# Altium PCB VasSnow_2021-12-09.pcbdoc
Units mil, origin at the board's own origin, x right, y up, seen from the top; angles counter-clockwise.
Board outline 1824 x 2137.36 mil, 2 copper layers (Top Layer, Bottom Layer); 14 components, 22 nets, 74 pads, 49 vias.
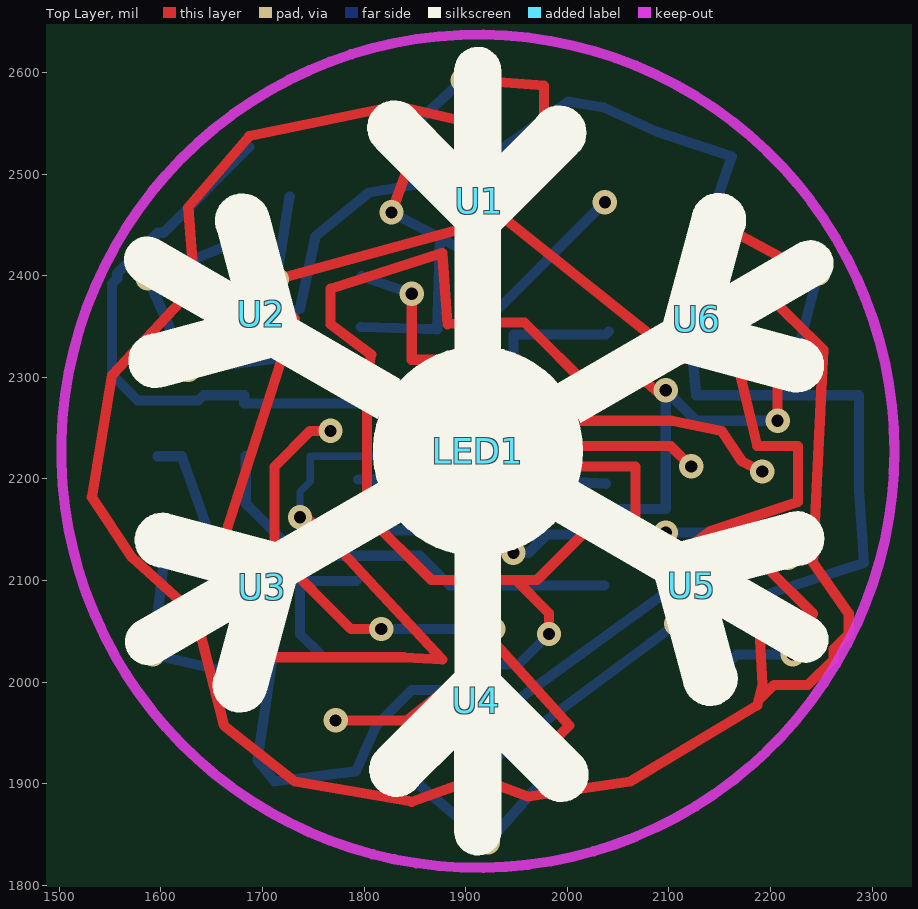
[diagram p0: Top Layer view]
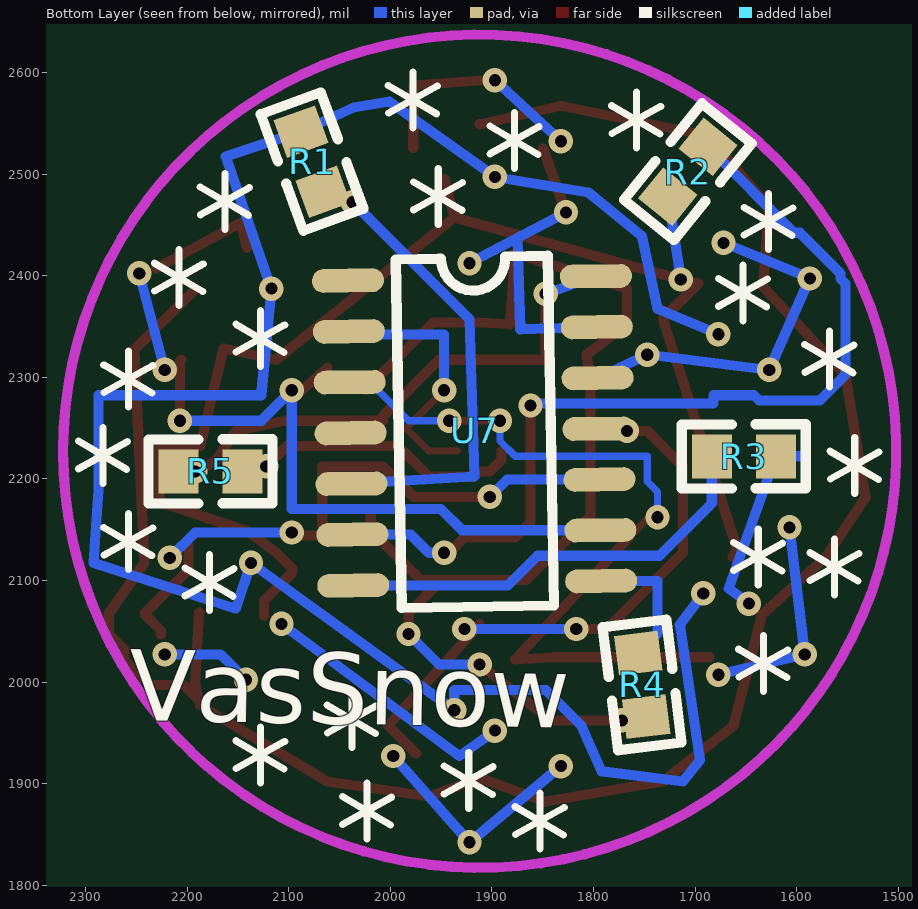
[diagram p1: Bottom Layer view, seen from below]

## Layer stack, top to bottom
Top Layer: signal copper (thickness not stored)
Dielectric: dielectric 12.6, FR-4, Dk 4.8
Bottom Layer: signal copper (thickness not stored)

## Board outline
2824,1000 1000,1000 1000,3137.36 2824,3137.36

## Components (designator, comment, footprint, x,y, rotation, side; value= is the part's Value field where it differs from the comment)
LED1 "TJ-S1005SW4TGLC7K-A5" LED0402-RD 1912,2227.36 r0 top
R1 "300" R0603 2077,2512.36 r70 bottom
R2 "300" R0603 1707,2502.36 r309 bottom
R3 "300" R0603 1652,2222.36 r180 bottom
R4 "300" R0603 1752,1997.36 r263 bottom
R5 "180" R0603 2177,2207.36 r0 bottom
U1 "snowflake" SNOWFLAKE_CONNECTOR 1952,2432.36 r0 top
U2 "snowflake" SNOWFLAKE_CONNECTOR 1754,2365.36 r60 top
U3 "snowflake" SNOWFLAKE_CONNECTOR 1715,2159.36 r120 top
U4 "snowflake" SNOWFLAKE_CONNECTOR 1872,2022.36 r180 top
U5 "snowflake" SNOWFLAKE_CONNECTOR 2067,2092.36 r240 top
U6 "snowflake" SNOWFLAKE_CONNECTOR 2112,2292.36 r300 top
U7 "ATTINY84A-SSU" SOIC-14_L8.7-W3.9-P1.27-LS6.0-BL 1917,2247.36 r89 bottom
? "" ? 1912,1864.68 r0 top

## Footprints (in the part's own frame and the unit in brackets; to place one, negate y for a bottom-side part, rotate by r counter-clockwise, add the part's x,y. Pads: shape width x height; smd on the part's side, far side on the other; paste and mask are expansions set on the pad)
LED0402-RD [mm]
  rect 0.6x0.5 smd: 1(-0.55,0) 2(0.55,0)
  silkscreen extent -1.15,-0.45 1.05,0.45
R0603 [mm]
  rect 1x1.1 smd: 1(0.8,0) 2(-0.8,0)
  silkscreen extent -1.55,-0.81 1.55,0.8
SNOWFLAKE_CONNECTOR [mm]
  rect 0.5x0.6 smd: 1(-1.016,-1.989) 4(-1.016,2.964) 5(-1.016,-0.889) 5(-1.016,4.064)
  rect 0.6x0.5 smd rot 135: 2(-1.821,1.576) 5(-2.599,2.354)
  rect 0.6x0.5 smd rot 45: 3(-0.135,1.601) 5(0.643,2.379)
  silkscreen extent -3.66,-2.65 1.57,4.83
SOIC-14_L8.7-W3.9-P1.27-LS6.0-BL [mm]
  oval 0.6x1.8 smd: 1(3.81,3.1) 2(2.54,3.1) 3(1.27,3.1) 4(0,3.1) 5(-1.27,3.1) 6(-2.54,3.1) 7(-3.81,3.1) 8(-3.81,-3.1) 9(-2.54,-3.1) 10(-1.27,-3.1) 11(0,-3.1) 12(1.27,-3.1) 13(2.54,-3.1) 14(3.81,-3.1)
  silkscreen extent -4.4,-1.91 4.34,1.9
? [mil]

## Via types
v1: diameter 24, hole 12, Top Layer to Bottom Layer, 49 vias

## Nets (pads, with @x,y where several pads share a name; then routed paths per layer and width w, separated by ;. In a path a pad name is that pad's centre, name@x,y a point inside that pad or via, vN(x,y) a via of type N, cw(c..) or ccw(c..) an arc to the next point about the centre after c; other vN are vias at no path point)
GND: R5.1 U7.14 | length 509.5
  Top Layer w10: v1(1847,2382.36) 1847,2317.36 1952,2317.36 2007,2262.36 2007,2257.36 2102,2257.36 2152,2247.36 2172,2217.36 v1(2192,2207.36)
  Bottom Layer w10: U7.14 v1(1847,2382.36)
LED1_1: LED1.1 R5.2 | length 267.6
  Top Layer w10: LED1.1@1890.35,2227.36 1890.35,2219.01 1902,2207.36 1912,2207.36 1917,2202.36 1962,2202.36 1992,2232.36 2102,2232.36 v1(2122,2212.36)
LED1_2: LED1.2 U7.2 | length 263.1
  Top Layer w7: LED1.2 1962,2227.36 1984.5,2249.86 v1(1947,2287.36)
  Bottom Layer w10: v1(1947,2287.36) 1947,2342.36 2037.9,2342.36 U7.2
R1_2: R1.2 U7.5 | length 439.1
  Bottom Layer w10: v1(2037,2472.36) 1922,2357.36 1917,2202.36 U7.5@2038.2,2195.26
R2_2: R2.2 U7.6 | length 924.4
  Top Layer w10: v1(1862,2272.36) 1862,2157.36 1877,2142.36 1927,2142.36 1942,2127.36 v1(1947,2127.36)
  Bottom Layer w10: R2.2 1602.7,2442.36 1597,2442.36 1557,2402.36 1557,2397.36 1552,2392.36 1552,2302.36 1577,2277.36 1637,2277.36 1642,2282.36 1682,2282.36 1682,2274.36 v1@1862,2274.36 ; v1(1947,2127.36) 1962,2127.36 1979.88,2145.24 U7.6
R3_2: R3.2 U7.7 | length 432.8
  Bottom Layer w10: R3.2 1683.5,2175.86 1735,2124.36 1855,2124.36 1884.1,2095.26 U7.7@2036.4,2095.26
R4_2: R4.2 U7.8 | length 134
  Bottom Layer w10: R4.2@1755.8,2028.65 1737,2047.45 1737,2099.55 U7.8@1792.3,2099.55
S$7: 
S$19662: 
S$19669: 
U1_1: R4.1 U1.1 U2.1 U3.1 U4.1 U5.1 U6.1 | length 1187.3
  Top Layer w10: v1(1772,1962.36) 1842,1962.36 v1(1912,2017.36) ; 1949.32,2100.66 1982,2067.97 v1(1982,2047.36) ; U5.1 2019.19,2149.55 1970.3,2100.66 U4.1 1866.02,2100.66 U3.1 1802.81,2290.56 U2.1 1807,2322.36 1767,2352.36 1767,2387.36 1877,2422.36 1882,2352.36 U1.1 1957.98,2354.05 U6.1
  Bottom Layer w10: v1(1912,2017.36) 1952,2017.36 v1(1982,2047.36)
U1_2: R1.1 U1.2 U2.2 U3.2 U4.2 U5.2 U6.2 | length 2096.9
  Bottom Layer w10: v1(1677,2342.36) 1737,2367.36 1752.4,2439.05 1804.9,2482.05 v1(1897,2497.36) 2000.8,2571.45 2036,2565.55 R1.1@2087.8,2541.95 ; v1(1692,2087.36) 1715,2056.36 1695.3,1923.26 1712,1902.36 1792,1912.36 1812,1957.36 1847,1992.36 1937,1992.36 v1(1937,1972.36) v1(2137,2117.36) 2152,2072.36 2292,2117.36 2287,2189.05 2287,2282.36 2127,2282.36 v1(2117,2387.36) 2162,2517.36 R1.1
U1_3: R2.1 U1.3 U2.3 U3.3 U4.3 U5.3 U6.3 | length 1604.8
  Top Layer w10: U3.3@1663.1,2123.26 1658.8,2131.55 1731.7,2357.55 U2.3 v1(1714,2396.36) 1937,2457.36 ; U1.3 1937,2457.36 ; U5.3 2124.25,2080.11 2097,2107.36 2097,2112.36 2112,2127.36 2140,2148.36 2227,2177.36 2227,2232.36 2187,2232.36 U6.3 2112,2317.36 1937,2457.36
  Bottom Layer w10: v1(1714,2396.36) R2.1 ; v1(1897,1952.36) 1932,1927.36 v1(2107,2057.36)
U1_4: R3.1 U1.4 U2.4 U3.4 U4.4 U5.4 U6.4 | length 2258.5
  Top Layer w10: U1.4 1832,2567.36 1687,2537.36 1627,2467.36 U2.4 1552,2302.36 1532,2182.36 1572,2122.36 U3.4 1662,1957.36 1732,1902.36 1847,1882.36 U4.4 1962,1887.36 2062,1902.36 2187,1977.36 2192,1997.36 U5.4 ; 2188.18,1982.07 2203.47,1997.36 2237,1997.36 2262,2022.36 2262,2032.36 2277,2047.36 2277,2067.36 2242,2117.36 2252,2327.36 U6.4
  Bottom Layer w10: 1597,2222.36 R3.1 1667,2092.36 v1(1647,2077.36)
U1_5: U1.5 U7.13 | length 554.2
  Top Layer w10: v1(1827,2462.36) U1.5@1849.69,2525.01 ; U1.5@1912,2592.36 1977,2587.36 U1.5@1977.31,2526.01
  Bottom Layer w10: U7.13 1872,2347.36 1874.83,2437.18 ; v1(1827,2462.36) v1(1922,2412.36) ; v1(1832,2532.36) v1(1897,2592.36)
U2_5: U2.5 U7.12 | length 365.3
  Bottom Layer w10: v1(1672,2432.36) v1(1587,2397.36) v1(1627,2307.36) v1(1747,2322.36) U7.12
U3_5: U3.5 U7.3 | length 1003.8
  Top Layer w7: v1(1737,2162.36) 1745.17,2162.36 U3.5@1765.31,2142.22 ; v1(1892,2257.36) v1(1942,2257.36)
  Top Layer w10: U3.5@1685.9,2024.45 1839.1,2024.45 1877,2022.36 U3.5@1765.3,2142.26
  Bottom Layer w7: v1(1737,2162.36) 1737,2187.36 1747,2197.36 1747,2222.36 1877,2222.36 1892,2237.36 v1(1892,2257.36) ; v1(1942,2257.36) 1982,2257.36 2019.86,2295.21 U7.3
  Bottom Layer w10: v1(1607,2152.36) v1(1592,2027.36) v1(1677,2007.36)
U4_5: U4.5 U7.11 | length 804.7
  Top Layer w10: v1(1767,2247.36) 1747,2247.36 1712,2212.36 1712,2127.36 1787,2052.36 v1(1817,2052.36) ; U4.5@1912,2057.36 2002,1957.36 U4.5@1974.31,1929.69
  Bottom Layer w10: v1(1817,2052.36) v1(1927,2052.36) ; v1(1832,1917.36) v1(1922,1842.36) v1(1997,1927.36)
U5_5: U5.5 U7.10 | length 739.3
  Top Layer w10: v1(1902,2182.36) 1977,2182.36 2007,2212.36 2067,2212.36 2067,2154.86 U5.5@2056.7,2144.45 ; U5.5@2056.69,2144.5 2094.14,2144.5 v1(2097,2147.36) ; U5.5@2198.4,2134.63 2198.4,2110.95 2242,2067.36 2225.56,2050.92 U5.5@2225.56,2047
  Bottom Layer w10: U7.10 1884.86,2199.49 v1(1902,2182.36) ; v1(2097,2147.36) 2192,2147.36 v1(2217,2122.36) ; v1(2142,2002.36) 2167,2027.36 v1(2222,2027.36)
U6_5: U6.5 U7.9 | length 875
  Top Layer w10: U6.5@2061.7,2309.45 2087,2287.36 v1(2097,2287.36) ; U6.5@2141.09,2427.29 2147,2452.36 U6.5@2230.56,2407 ; U6.5@2205.77,2317.27 2207,2316.03 v1(2207,2257.36)
  Bottom Layer w10: U7.9 1929.1,2149.45 1950,2170.36 2097,2170.36 v1(2097,2287.36) 2127,2257.36 v1(2207,2257.36) ; v1(2222,2307.36) v1(2247,2402.36)
U7_4: U7.4
VCC: U7.1

## Keep-outs
Keep-Out Layer:
  circle w10 net S$7: c1912,2227.36 r410

## Silkscreen, mask and mechanical layers (free items; w line width, h text height)
Top Overlay:
  circle w10: c1912,2227.36 r98.43
  region: 1837,2292.36 1847,2302.36 1872,2317.36 1917,2327.36 1927,2322.36 1952,2317.36 1972,2302.36 1977,2297.36 1997,2272.36 2007,2262.36 2007,2237.36 2007,2222.36 2012,2217.36 2007,2197.36 1997,2182.36 1982,2157.36 1962,2147.36 1947,2132.36 1902,2132.36 1897,2127.36 1887,2132.36 1877,2137.36 1867,2137.36 1837,2167.36 1822,2182.36 1822,2202.36 1817,2207.36 1817,2242.36 1812,2247.36 1817,2252.36 1827,2272.36 1827,2282.36 1837,2292.36 1842,2297.36
Bottom Overlay:
  lines w7 net S$19662: 1542.77,2185.72 1542.77,2240.72 ; 1562.77,2085.72 1562.77,2140.72 ; 1567.77,2290.72 1567.77,2345.72 ; 1627.77,2425.72 1627.77,2480.72 ; 1632.77,1990.72 1632.77,2045.72 ; 1637.77,2095.72 1637.77,2150.72 ; 1652.77,2355.72 1652.77,2410.72 ; 1757.77,2525.72 1757.77,2580.72 ; 1852.77,1835.72 1852.77,1890.72 ; 1877.77,2505.72 1877.77,2560.72 ; 1922.77,1875.72 1922.77,1930.72 ; 1952.77,2450.72 1952.77,2505.72 ; 1977.77,2545.72 1977.77,2600.72 ; 2022.77,1845.72 2022.77,1900.72 ; 2037.77,1935.72 2037.77,1990.72 ; 2127.77,1900.72 2127.77,1955.72 ; 2127.77,2310.72 2127.77,2365.72 ; 2162.77,2445.72 2162.77,2500.72 ; 2177.77,2070.72 2177.77,2125.72 ; 2207.77,2370.72 2207.77,2425.72 ; 2257.77,2110.72 2257.77,2165.72 ; 2257.77,2270.72 2257.77,2325.72 ; 2282.77,2195.72 2282.77,2250.72
  lines w7 net S$19669: 1518.77,2226.72 1566.86,2200.03 ; 1519.58,2199.49 1567,2227.36 ; 1538.77,2126.72 1586.86,2100.03 ; 1539.58,2099.49 1587,2127.36 ; 1543.77,2331.72 1591.86,2305.03 ; 1544.58,2304.49 1592,2332.36 ; 1603.77,2466.72 1651.86,2440.03 ; 1604.58,2439.49 1652,2467.36 ; 1608.77,2031.72 1656.86,2005.03 ; 1609.58,2004.49 1657,2032.36 ; 1613.77,2136.72 1661.86,2110.03 ; 1614.58,2109.49 1662,2137.36 ; 1628.77,2396.72 1676.86,2370.03 ; 1629.58,2369.49 1677,2397.36 ; 1733.77,2566.72 1781.86,2540.03 ; 1734.58,2539.49 1782,2567.36 ; 1828.77,1876.72 1876.86,1850.03 ; 1829.58,1849.49 1877,1877.36 ; 1853.77,2546.72 1901.86,2520.03 ; 1854.58,2519.49 1902,2547.36 ; 1898.77,1916.72 1946.86,1890.03 ; 1899.58,1889.49 1947,1917.36 ; 1928.77,2491.72 1976.86,2465.03 ; 1929.58,2464.49 1977,2492.36 ; 1953.77,2586.72 2001.86,2560.03 ; 1954.58,2559.49 2002,2587.36 ; 1998.77,1886.72 2046.86,1860.03 ; 1999.58,1859.49 2047,1887.36 ; 2013.77,1976.72 2061.86,1950.03 ; 2014.58,1949.49 2062,1977.36 ; 2103.77,1941.72 2151.86,1915.03 ; 2103.77,2351.72 2151.86,2325.03 ; 2104.58,1914.49 2152,1942.36 ; 2104.58,2324.49 2152,2352.36 ; 2138.77,2486.72 2186.86,2460.03 ; 2139.58,2459.49 2187,2487.36 ; 2153.77,2111.72 2201.86,2085.03 ; 2154.58,2084.49 2202,2112.36 ; 2183.77,2411.72 2231.86,2385.03 ; 2184.58,2384.49 2232,2412.36 ; 2233.77,2151.72 2281.86,2125.03 ; 2233.77,2311.72 2281.86,2285.03 ; 2234.58,2124.49 2282,2152.36 ; 2234.58,2284.49 2282,2312.36 ; 2258.77,2236.72 2306.86,2210.03 ; 2259.58,2209.49 2307,2237.36
  text "VasSnow" at 2257.61,1962.36 h70 r1